# Altium PCB Main.PcbDoc
Units mil, origin at the board's own origin, x right, y up, seen from the top; angles counter-clockwise.
Board outline 2590 x 375 mil, 2 copper layers (Top Layer, Bottom Layer), stack 61.855 mil thick; 38 components, 28 nets, 108 pads, 57 vias.
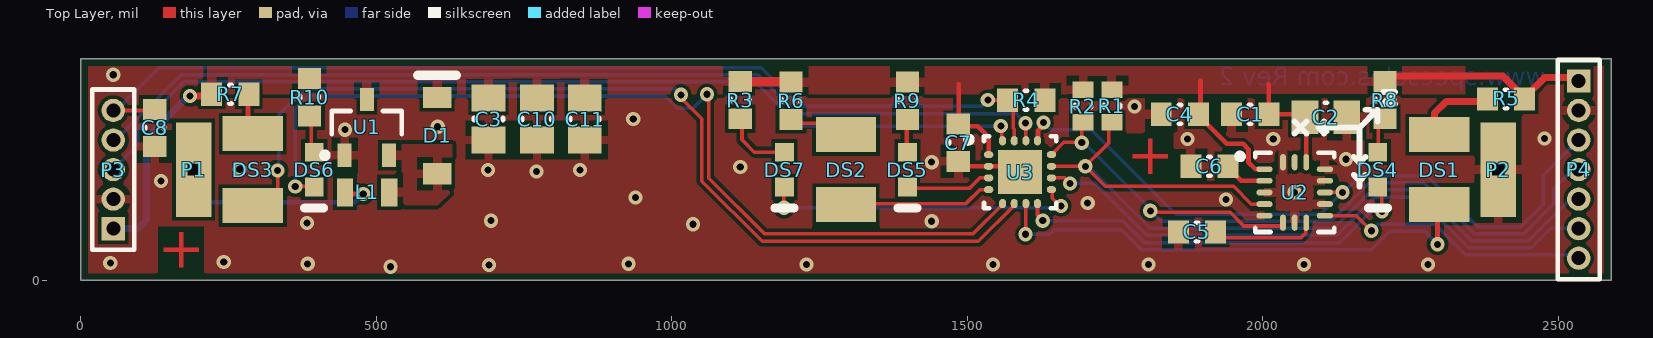
[diagram p0: Top Layer view]
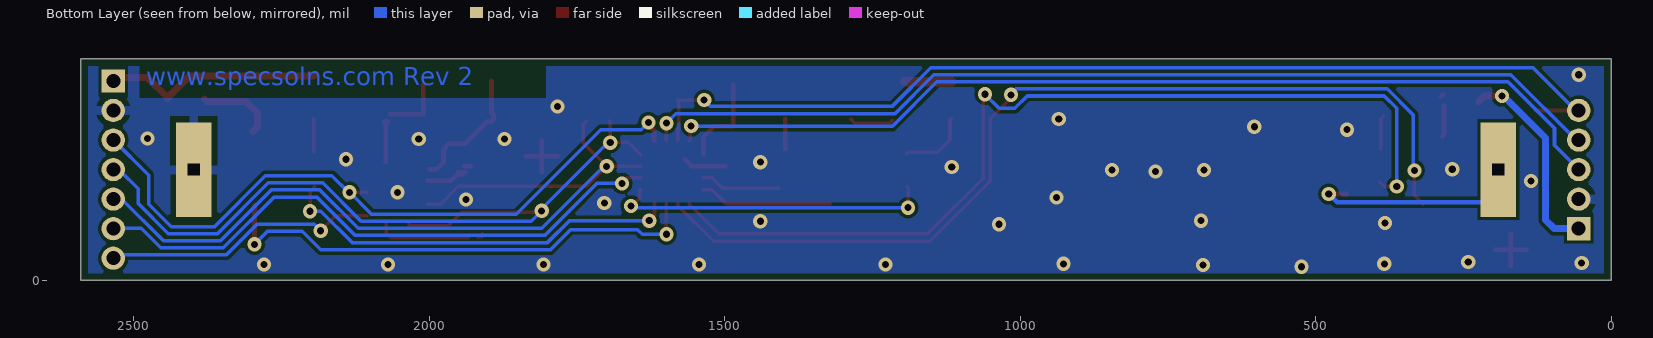
[diagram p1: Bottom Layer view, seen from below]

## Layer stack, top to bottom
Top Solder: solder mask 0.4, Solder Resist, Dk 3.5
Top Layer: signal copper 1.4
Dielectric 1: dielectric 59.0551, FR-4, Dk 4.8
Bottom Layer: signal copper 1.4
Bottom Solder: solder mask 0.4, Solder Resist, Dk 3.5

## Board outline
0,0 2590,0 2590,375 0,375

## Design rules (kind name [scope] priority, off if disabled: settings)
BoardOutlineClearance [All] p1: gap=12 ignorepadtopadclearanceinfootprint=FALSE
Clearance Clearance_1 [All] p1: gap=6 ignorepadtopadclearanceinfootprint=FALSE
ComponentClearance [All] p1: gap=6 collisioncheckmode=3 verticalgap=6 showdistances=TRUE
DiffPairsRouting [All] p1: maxlimit=10 minlimit=6 mostfreqgap=6 toplayer_minwidth=6 toplayer_maxwidth=15 toplayer_prefwidth=8 bottomlayer_minwidth=6 bottomlayer_maxwidth=15 bottomlayer_prefwidth=8 maxuncoupledlength=500
HoleSize [All] p1: absolutevalues=TRUE maxlimit=150 minlimit=7.87 maxpercent=80.000 minpercent=20.000
HoleToHoleClearance [All] p1: gap=18 allowstackedmicrovias=TRUE
MaxMinImpedance [InNet('NetC8_1')] p1: minimum=49.00 maximum=52.00
MinimumAnnularRing [All] p1: minimumring=6
MinimumSolderMaskSliver [All] p1 off: minsoldermaskwidth=6
PlaneClearance [All] p1: clearance=12
PlaneConnect PlaneConnect_IsVia [IsVia] p1: planeconnectstyle=Direct reliefexpansion=20 reliefentries=4 reliefconductorwidth=10 reliefairgap=10
PlaneConnect [All] p2: planeconnectstyle=Relief reliefexpansion=20 reliefentries=4 reliefconductorwidth=15 reliefairgap=12
PolygonConnect PolygonConnect_IsVia [IsVia] p1: connectstyle=Direct reliefconductorwidth=10 reliefentries=4 polygonreliefangle="45 Angle" airgapwidth=10
PolygonConnect [All] p2: connectstyle=Relief reliefconductorwidth=15 reliefentries=4 polygonreliefangle="90 Angle" airgapwidth=10
RoutingVias [All] p1: holewidth=7.87 width=14.17 viastyle="Through Hole" minholewidth=7.87 minwidth=13.78 maxholewidth=28 maxwidth=50
SilkToSilkClearance [All] p1: silktosilkclearance=6
SilkToSolderMaskClearance [IsPad] p1 off: minsilkscreentomaskgap=6 clearancetoexposedcopper=TRUE
SolderMaskExpansion [Not IsVia] p1: expansion=4
Width [All] p1: maxlimit=50 minlimit=4 preferedwidth=6
21 further rules are at their usual default settings.

## Classes and differential pairs
component class Main: C1 C2 C3 C4 C5 C6 C7 C10 C11 D1 DS1 DS2 DS3 DS4 DS5 DS6 DS7 L1 P1 P2 P3 P4 R1 R2 R3 R4 R5 R6 R7 R8 R9 R10

## Components (designator, comment, footprint, x,y, rotation, side; value= is the part's Value field where it differs from the comment)
C1 "CAP 100nF 16V 0603(1608)" CAPC0603(1608)100_N 1979,281 r0 top value=100nF
C2 "CAP 10uF 10V 0805(2012)" CAPC0805(2012)145_N 2107,276 r0 top value=10uF
C3 "CAP 10uF 10V 0805(2012)" CAPC0805(2012)145_N 690,273 r270 top value=10uF
C4 "CAP 100nF 16V 0603(1608)" CAPC0603(1608)100_N 1860,281 r0 top value=100nF
C5 "CAP 100nF 16V 0603(1608)" CAPC0603(1608)100_N 1889,82 r0 top value=100nF
C6 "CAP 100nF 16V 0603(1608)" CAPC0603(1608)100_N 1910,193 r0 top value=100nF
C7 "CAP 100nF 16V 0603(1608)" CAPC0603(1608)100_N 1485,233 r90 top value=100nF
C8 "CAP 100nF 16V 0603(1608)" CAPC0603(1608)100_N 125,258 r90 top value=100nF
C10 "CAP 10uF 10V 0805(2012)" CAPC0805(2012)145_N 772,273 r270 top value=10uF
C11 "CAP 10uF 10V 0805(2012)" CAPC0805(2012)145_N 853,273 r270 top value=10uF
D1 "DSS16UTR" MCC-SOD-123FL_V 603,245 r90 top
DS1 "LR T67F-U1AA-1-1-Z" "LR T67F-U1AA-1-1-Z" 2299,187.5 r270 top locked
DS2 "LY T67F-U1AA-36-1-Z" "LY T67F-U1AA-36-1-Z" 1295,187.5 r270 top locked
DS3 "IN-P32ATG" IN-P32ATG 291,187.5 r270 top locked
DS4 "SX-0603-PINK" LITE-ON-LTST-C191KRKT-2_V 2195,187.5 r270 top locked
DS5 "SX-0603-PINK" LITE-ON-LTST-C191KRKT-2_V 1399,187.5 r270 top locked
DS6 "SX-0603-PINK" LITE-ON-LTST-C191KRKT-2_V 395,187.5 r270 top locked
DS7 "SX-0603-PINK" LITE-ON-LTST-C191KRKT-2_V 1191,187.5 r270 top
L1 "LBR2012T470K" "0805 Inductor" 447,149 r0 top
P1 "No. 5 Terminal" "AA BATTERY TERMINAL"#1 355,495 r90 top
P2 "No. 5 Terminal" "AA BATTERY TERMINAL"#2 2399,187.5 r90 top locked
P3 "MHDR1X5" MHDR1X5 55,87.5 r90 top
P4 "MHDR1X7" MHDR1X7 2535,337.5 r270 top locked
R1 "4K75 1% 0603(1608)" RESC0603(1608)_L 1745,295 r90 top value="4750.00 Ohm"
R2 "4K75 1% 0603(1608)" RESC0603(1608)_L 1696,295 r90 top value="4750.00 Ohm"
R3 "39R 5% 0603(1608)" RESC0603(1608)_N 1116,305 r270 top value="39.00 Ohm"
R4 "10K 5% 0603(1608)" RESC0603(1608)_N 1600,305 r0 top value="10000.00 Ohm"
R5 "56R 5% 0603(1608)" RESC0603(1608)_N 2412,307 r180 top value="56.00 Ohm"
R6 "39R 5% 0603(1608)" RESC0603(1608)_N 1202,304 r270 top value="39.00 Ohm"
R7 "56R 5% 0603(1608)" RESC0603(1608)_N 253,315 r0 top value="56.00 Ohm"
R8 "39R 5% 0603(1608)" RESC0603(1608)_N 2207,305 r270 top value="39.00 Ohm"
R9 "39R 5% 0603(1608)" RESC0603(1608)_N 1399,304 r270 top value="39.00 Ohm"
R10 "39R 5% 0603(1608)" RESC0603(1608)_N 387,310 r270 top value="39.00 Ohm"
U1 "QX2303" SOT95P237X111-3N 484,259 r90 top
U2 "FXOS8700CQR1" QFN50P300X300X120-16N 2054.25,148.78 r0 top
U3 "MKL03Z32VFG4" PQFN50P300X300X6_HS-17N 1589.53,183.15 r0 top
? "Fiducial (Cross)" "Fiducial - Cross" 170,52 r0 top
? "Fiducial (Cross)" "Fiducial - Cross" 1810,210 r0 top

## Footprints (in the part's own frame and the unit in brackets; to place one, negate y for a bottom-side part, rotate by r counter-clockwise, add the part's x,y. Pads: shape width x height; smd on the part's side, far side on the other; paste and mask are expansions set on the pad)
"0805 Inductor" [mm] "0805 Inductor"
  rect 0.7x1.2 smd: 1(0,0) 2(1.9,0)
"AA BATTERY TERMINAL"#1 [mil] "No. 5 Battery Terminal"
  rect 160x60 hole 20 square: 1(-307.5,164)
"AA BATTERY TERMINAL"#2 [mil] "No. 5 Battery Terminal"
  rect 160x60 hole 20 square: 1(0,0)
CAPC0603(1608)100_N [mm] "Chip Capacitor, Body 1.6x0.8mm, Height 1.0mm, IPC Medium Density"
  rect 0.9x1 smd: 1(-0.8,0) 2(0.8,0)
  silkscreen extent -0.05,-0.4 0.05,0.4, body extent -0.87,-0.48 0.88,0.47, height 1
CAPC0805(2012)145_N [mm] "Chip Capacitor, Body 2.0x1.2mm, Height 1.45mm, IPC Medium Density"
  rect 1.15x1.45 smd: 1(-0.9,0) 2(0.9,0)
  silkscreen extent -0.05,-0.62 0.05,0.63, body extent -1.1,-0.72 1.1,0.73, height 1.45
"Fiducial - Cross" [mil] "Fiducial (Cross)"
  Top Layer region: 30,-4 30,4 -30,4 -30,-4
  Top Layer region: -4,-30 4,-30 4,30 -4,30
  Top Layer pour cut-out: -39.37,39.37 39.37,39.37 39.37,-39.37 -39.37,-39.37
IN-P32ATG [mm] "PLCC-2 SMD True Green 527nm"
  rect 1.5x2.6 smd: 1(-1.55,0) 2(1.55,0)
  body extent -1.75,-1.4 1.75,1.4, height 1.9
LITE-ON-LTST-C191KRKT-2_V [mm] "Chip, 2-Leads, Body 1.6x0.8mm"
  rect 0.8x0.8 smd: 1(-0.75,0) 2(0.75,0)
  silkscreen extent 1.65,-0.4 1.65,0.4, body extent -0.8,-0.4 0.8,0.4, height 0.55
"LR T67F-U1AA-1-1-Z" [mm] "PLCC-2 SMD Red 625nm"
  rect 1.5x2.6 smd: 1(-1.5,0) 2(1.5,0)
  body extent -1.7,-1.5 1.7,1.5, height 2.1
"LY T67F-U1AA-36-1-Z" [mm] "PLCC-2 SMD Yellow 590nm"
  rect 1.5x2.6 smd: 1(-1.5,0) 2(1.5,0)
  body extent -1.7,-1.5 1.7,1.5, height 2.1
MCC-SOD-123FL_V [mil] "SODFL, 2-Leads, Body 3.1x1.9mm"
  rect 36x48 smd: 1(-64.5,0) 2(64.5,0)
  silkscreen extent 102,-32 102,32, body extent -73,-37 73,37, height 47
MHDR1X5 [mm] "Connector; Header; 5 Position"
  rect 1x1 hole 0.6: 1(0,0)
  round 1 hole 0.6: 2(1.27,0) 3(2.54,0) 4(3.81,0) 5(5.08,0)
  silkscreen extent -0.9,-0.9 5.98,0.9
MHDR1X7 [mm] "Connector; Header; 7 Position"
  rect 1x1 hole 0.6: 1(0,0)
  round 1 hole 0.6: 2(1.27,0) 3(2.54,0) 4(3.81,0) 5(5.08,0) 6(6.35,0) 7(7.62,0)
  silkscreen extent -0.9,-0.9 8.52,0.9
PQFN50P300X300X6_HS-17N [mm] "PQFN, 16-Leads, Body 3.00x3.00mm, Pitch 0.50mm, Thermal Pad 1.90x1.90mm, IPC Medium Density"
  oval 0.4x0.3 smd paste-0.025: 1(-1.35,0.75) 2(-1.35,0.25) 3(-1.35,-0.25) 4(-1.35,-0.75) 9(1.35,-0.75) 10(1.35,-0.25) 11(1.35,0.25) 12(1.35,0.75)
  oval 0.3x0.4 smd paste-0.025: 5(-0.75,-1.35) 6(-0.25,-1.35) 7(0.25,-1.35) 8(0.75,-1.35) 13(0.75,1.35) 14(0.25,1.35) 15(-0.25,1.35) 16(-0.75,1.35)
  rect 1.9x1.9 smd paste-1.016: 17(0,0)
  silkscreen extent -2.32,-1.55 1.55,1.55, body extent -1.55,-1.55 1.55,1.55, height 0.07
QFN50P300X300X120-16N [mm] "QFN, 16-Leads, Body 3.00x3.00mm, Pitch 0.50mm, IPC Medium Density"
  oval 0.7x0.25 smd paste-0.02: 1(-1.3,1) 2(-1.3,0.5) 3(-1.3,0) 4(-1.3,-0.5) 5(-1.3,-1) 9(1.3,-1) 10(1.3,-0.5) 11(1.3,0) 12(1.3,0.5) 13(1.3,1)
  oval 0.25x0.7 smd paste-0.02: 6(-0.5,-1.3) 7(0,-1.3) 8(0.5,-1.3) 14(0.5,1.3) 15(0,1.3) 16(-0.5,1.3)
  silkscreen extent -2.47,-1.7 4.32,4.32, body extent -1.55,-1.55 1.55,1.55, height 1.2
RESC0603(1608)_L [mm] "Chip Resistor, Body 1.6x0.8mm, IPC High Density"
  rect 0.7x0.9 smd: 1(-0.7,0) 2(0.7,0)
  silkscreen extent -0.05,-0.35 0.05,0.35, body extent -0.85,-0.47 0.85,0.47, height 0.6
RESC0603(1608)_N [mm] "Chip Resistor, Body 1.6x0.8mm, IPC Medium Density"
  rect 0.9x1 smd: 1(-0.8,0) 2(0.8,0)
  silkscreen extent -0.05,-0.4 0.05,0.4, body extent -0.85,-0.47 0.85,0.47, height 0.6
SOT95P237X111-3N [mm] "SOT23, 3-Leads, Body 2.92x2.37mm, Pitch 0.95mm, IPC Medium Density"
  rect 1x0.6 smd: 1(-1.2,0.95) 2(-1.2,-0.95) 3(1.2,0)
  silkscreen extent -1.32,-1.5 0.7,1.92, body extent -1.42,-1.52 1.42,1.52, height 1.11

## Part data
C1 C4 C5 C6 C7 C8: library part CMP-1035-02585-1, "CAP 100nF 16V ±20% 0603 (1608 Metric) Thickness 1mm SMD", Case-EIA=0603, Case-Metric=1608, Rated Voltage="16 V", Tolerance=±20%, Max Thickness="1 mm", Technology=SMT
C2 C3 C10 C11: library part CMP-1036-04924-1, "CAP 10uF 10V ±20% 0805 (2012 Metric) Thickness 1.45mm SMD", Case-EIA=0805, Case-Metric=2012, Rated Voltage="10 V", Tolerance=±20%, Max Thickness="1.45 mm", Technology=SMT
D1: library part CMP-2000-07084-1, "SCHOTTKY 60V SOD-123FL", Forward Current If(AV)=1A, Forward Surge Current Ifsm Max=30A, Forward Voltage VF Max=1.1V, Manufacturer="Micro Commercial Components", Package Description="2-Pin Small Outline Diode, Flat Lead, Body 2.825 x 1.65 mm", Package Reference=SOD-123FL, Repetitive Reverse Voltage Vrrm Max=1kV, Datasheet URL=http://www.mccsemi.com/up_pdf/SM4001PL-SM4007PL(SOD-123FL).PDF, Datasheet Version="Rev. H, 05/2015", Diode Configuration=Single, Diode Type=StandardRecovery, Manufacturer URL=http://www.mccsemi.com/, Mounting Technology=SurfaceMount
DS1: "PLCC-2 SMD RED 625nm"
DS2: "PLCC-2 SMD YELOW 590nm"
DS3: "PLCC-2 SMD True Green 527nm"
DS4 DS5 DS6 DS7: library part CMP-2000-05198-1, "Chip LED, Green, 574 nm, 40 pF, -55 to 85 degC, 2-Pin SMD, RoHS, Tape and Reel", Emitting Color=YellowGreen, Forward Current=30mA, Forward Voltage=2.4V, Manufacturer=Lite-On, Operating Temperature Classification=Industrial, Operating Temp Range=-55Cto85C, Package Type=ChipLed, Power Dissipation=75W, Reverse Voltage=5V, Test Current (It)=20mA, Chip Material=AlGaInP, Datasheet URL=http://download.siliconexpert.com/pdfs/2007/08/26/semi_b/manual/lot/ds/ltst-c191kgkt.pdf, Datasheet Version=Jan-07, DELETED=Compliant, Dominant Wave Length=571nm, High Brightness=Yes, Lens Dimensions=1.1X0.8X0.37mm, Luminous Intensity=35mcd, Lum Intensity=35mcd, Main Category=ChipLED, Manufacturer URL=http://www.us.liteon.com/, Mounting=SurfaceMount, Number of Elements=1, Packaging=TapeandReel, Peak Wavelength=574nm, Pin Count=2, Product Depth (mm)=0.8mm, Product Height (mm)=0.55mm, Product Length (mm)=1.6mm, Rad Hardened=No, Shape Type=Rectangular, Type=Uni-Color, Viewing Angle=130deg
L1: library part LQM21PN1R0NGRD, "FIXED IND 47UH 75MA 1.7 OHM SMD"
P1 P2: library part "AA Battery Terminal", "AA Battery Terminal No. 5"
P3: "Header, 5-Pin", LatestRevisionDate=17-Jul-2002, LatestRevisionNote="Re-released for DXP Platform.", Publisher="Altium Limited"
P4: "Header, 7-Pin", LatestRevisionDate=17-Jul-2002, LatestRevisionNote="Re-released for DXP Platform.", Publisher="Altium Limited"
R1 R2: library part CMP-1012-00587-1, "4K75 0.1W 1% 0603 (1608 Metric)  SMD", Case-EIA=0603, Case-Metric=1608, Power="0.1 W", Tolerance="1 %", Technology=SMT
R3 R6 R8 R9 R10: library part CMP-1012-00040-1, "39R 0.1W 5% 0603 (1608 Metric)  SMD", Case-EIA=0603, Case-Metric=1608, Power="0.1 W", Tolerance="5 %", Technology=SMT
R4: library part CMP-1012-00098-1, "10K 0.1W 5% 0603 (1608 Metric)  SMD", Case-EIA=0603, Case-Metric=1608, Power="0.1 W", Tolerance="5 %", Technology=SMT
R5 R7: library part CMP-1012-00044-1, "56R 0.1W 5% 0603 (1608 Metric)  SMD", Case-EIA=0603, Case-Metric=1608, Power="0.1 W", Tolerance="5 %", Technology=SMT
U1: "3.3V BOOST"
U2: "6-axis sensor with integrated linear accelerometer and magnetometer"
U3: "Kinetis KL03 32 KB Flash QFN 16"
? ?: library part "Fiducial - Cross"

## Via types
v1: diameter 24, hole 12, Top Layer to Bottom Layer, tented both sides, 57 vias

## Nets (pads, with @x,y where several pads share a name; then routed paths per layer and width w, separated by ;. In a path a pad name is that pad's centre, name@x,y a point inside that pad or via, vN(x,y) a via of type N, cw(c..) or ccw(c..) an arc to the next point about the centre after c; other vN are vias at no path point)
3v3: C1.2 C2.1 C3.1 C4.2 C7.2 C10.1 C11.1 D1.2 P3.1 P4.1 R1.2 R2.2 R3.1 R4.2 R5.1 R6.1 R7.1 R8.1 R9.1 R10.1 U1.3 U2.1 U2.14 U3.1 | length 1355.1
  Top Layer w6: R6.1@1195.5,336.5 R6.1@1196,336
  Top Layer w8: 1486,331.5 1486,261 1518,261 1536.38,242.62 U3.1 ; C4.2 1895,284.5 1895,338 ; C4.2@1891.69,272 C4.2@1891.69,281 ; C4.2@1895,270 1894,269 1901,269 1939,231 1967,231 1976,222 1976,200 1988,188 U2.1@2000,188 ; 2010.5,331.5 C1.2 C2.1@2067,281 ; U2.14 C2.1@2073.94,267.06
  Top Layer w12: v1(185,312) 215,312 R7.1@224,303 ; C2.1@2073,268 C2.1@2073.94,267.06 ; R8.1@2196,346 2406.46,346 2442.73,309.73 2443.5,308.97 R5.1 ; R5.1@2442,309 2444,311 2445,311 2477,343 2529.5,343 P4.1 ; P4.1@2534,345 P4.1@2539,340
  Top Layer w16: R3.1 R6.1@1195.5,336.5
  Bottom Layer w12: P3.1 96.5,87.5 111,102 111,241 v1@178,308
\GREEN: DS3.2 U3.6 | length 1622.5
  Top Layer w6: DS3.2@318,129 333,144 v1(333,186) ; v1(1016,314) 1016,308.3 1051,273.3 1051,168 1153,66 1519.05,66 1579.69,126.64 U3.6
  Bottom Layer w6: v1(333,186) 335,188 335,279.97 379.03,324 1008,324 1016,316 v1(1016,314)
\PINK_G: DS6.2 U3.5 | length 1589.1
  Top Layer w6: v1(363,159) 385,159 DS6.2@392,166 ; v1(1060,315) 1063,312 1063,173 1157,79 1509.95,79 1560,129.05 U3.5
  Bottom Layer w6: v1(363,159) 363,291 384,312 988.3,312 1009.3,291 1036,291 v1(1060,315)
\PINK_R: DS4.2 U3.8 | length 689.7
  Top Layer w6: U3.8 1619.06,109.94 v1(1628,101) ; DS4.2@2195,159 2194,158 2202,150 v1(2202,117)
  Bottom Layer w6: v1(1628,101) 1763.04,101 1800.04,64 2130.61,64 2183.61,117 v1(2202,117)
\PINK_Y: DS5.2 U3.3 | length 134.5
  Top Layer w6: DS5.2@1409,156 1504.03,156 1521.33,173.31 U3.3
\RED: DS1.2 U3.7 | length 861.9
  Top Layer w6: v1(1599,78) 1599,129.63 U3.7 ; DS1.2@2295,129 DS1.2@2296,128
  Top Layer w8: v1(2296,61) DS1.2@2296,128
  Bottom Layer w6: v1(1599,78) 1640,78 1648,86 1761.07,86 1795.07,52 2184,52 2215,83 2274,83 v1(2296,61) v1@2301,61
\RST: C8.2 P3.5 R4.1 U3.15 | length 1732.2
  Top Layer w6: P3.5 127.5,287.5 C8.2@129,289 ; v1(1535,305) R4.1 1578.32,305 1579.32,306 1580.32,305 1578,302.69 1578,257.3 1579.69,255.62 U3.15
  Bottom Layer w6: P3.5 59.79,287.5 132.29,360 1151.32,360 1216.32,295 1525,295 v1(1535,305)
\YELLOW: DS2.2 U3.4 | length 224.2
  Top Layer w6: DS2.2@1321.97,130 1498.03,130 1521.65,153.62 U3.4
GND: C1.1 C2.2 C3.2 C4.1 C5.1 C6.1 C7.1 C8.1 C10.2 C11.2 P2.1 P3.2 P4.2 U1.1 U2.3 U2.5 U2.7 U2.10 U2.12 U2.13 U2.16 U3.2 U3.17 | length 73.8
  Top Layer w8: C7.1@1499.01,192.99 U3.2 1536.57,193.18 1556.25,193.18 U3.17@1567.87,204.8
  other v1: 524,23 691,26 1228,27 1544,27 1807,27 2070,27 2280,27 384,28 927,28 50,29.18 242,31 1036,95 383,97 1440,100 694,101 1704,131 1938,137 939,140 2054,149 136,168 771,184 689,187 845,187 269,188 1116,192 1440,200 2141,205 1873,239 2018,239 2477,240 447,255 604,260 935,273 1783,294 55,348
INT1: P4.3 U2.11 U3.13 | length 1186.9
  Top Layer w6: U2.11 2106.04,149.39 2134.61,149.39 v1(2135,149)
  Top Layer w8: U3.13 1619.78,237.03 1619.78,253.45 1629,262.67 v1(1629,267)
  Bottom Layer w6: v1(1629,267) 1641.32,254.68 1710.32,254.68 1853,112 2098,112 v1(2135,149) 2137,149 2165,177 2277.58,177 2363.58,91 2437,91 2475,129 2475,178 2534.5,237.5 P4.3
NetC5_2: C5.2 U2.8 | length 178.3
  Top Layer w6: C5.2@1910.51,79.18 C5.2@1916.01,73.67 ; C5.2@1911.01,73.67 C5.2@1916.01,73.67 ; C5.2@1917.01,72.67 C5.2@1916.01,73.67 ; C5.2@1917.01,73.67 C5.2@1916.01,73.67 ; C5.2@1932.5,74 1934.5,72 2065,72 2073.2,80.2 2073.2,97.2 U2.8@2074,98
NetC6_2: C6.2 U2.2 | length 88.9
  Top Layer w8: C6.2@1929.69,193 C6.2 ; C6.2@1938.5,183 C6.2@1946.8,183 ; C6.2@1943,180 C6.2@1946.8,180 ; C6.2@1946.8,179 C6.2@1949.9,182.1 ; C6.2@1951.15,183.35 C6.2@1949.9,182.1 ; U2.2 1963.54,168.46 C6.2@1949.9,182.1
NetD1_1: D1.1 L1.2 U1.2
NetDS1_1: DS1.1 R5.2 | length 133.8
  Top Layer w12: DS1.1@2299,252 2291,260 2291,283 2311,303 2376.5,303 R5.2
NetDS2_1: DS2.1 R6.2 | length 74.8
  Top Layer w6: R6.2@1217,270.5 1221.5,266 1280,266 DS2.1@1287,273
NetDS3_1: DS3.1 R7.2 | length 58.9
  Top Layer w8: R7.2@283,296 283,247 DS3.1@286,244 ; R7.2 R7.2@288.5,311
NetDS4_1: DS4.1 R8.2 | length 56.9
  Top Layer w6: DS4.1@2195,218 2196,219 R8.2@2196,274.5
NetDS5_1: DS5.1 R9.2 | length 51.5
  Top Layer w8: DS5.1@1398,222 R9.2@1398,273.48
NetDS6_1: DS6.1 R10.2 | length 58.6
  Top Layer w6: R10.2@385,278.5 390,273.5 DS6.1@390,222
NetDS7_1: DS7.1 R3.2 | length 121.8
  Top Layer w6: R3.2 1117.97,273.5 1119,272.47 1119,238 1140,217 1190,217 DS7.1@1193,214
NetP4_7: P4.7 U2.9 | length 469.6
  Top Layer w6: U2.9 2158.59,109.41 v1(2184,84)
  Bottom Layer w6: v1(2184,84) 2195,95 2291.7,95 2343.7,43 2531.5,43 2531.5,41 P4.7
SCL: P4.5 R1.1 U2.4 U3.11 | length 1452.9
  Top Layer w6: U3.11 v1(1700,193) ; R1.1@1734,269.78 1740,263.78 1740,233 v1(1700,193) ; U2.4 1980.91,129.09 1951,159 1734,159 v1(1700,193)
  Bottom Layer w6: v1(1700,193) 1704.98,193 1809.98,88 2120.67,88 2185.67,153 2267.64,153 2353.64,67 2449.94,67 2520.44,137.5 P4.5
SDA: P4.4 R2.1 U2.6 U3.12 | length 1373.8
  Top Layer w6: U3.12 1663.68,233.68 v1@1694,233.68 ; v1(1694,233) v1@1694,233.68 ; R2.1@1696,269.78 1694,267.78 v1@1694,233.68 ; v1(1810,117.68) 1812.68,115 1945,115 1968,92 2034,92 2033.83,92.17 2033.83,96.86 U2.6
  Bottom Layer w6: v1@1695,236 1810,121 v1(1810,117.68) 1827.68,100 2115.7,100 2180.7,165 2272.61,165 2358.61,79 2441.97,79 2493,130.03 2493,155 2522.31,184.31 2531.81,184.31 P4.4 2535,178.07 P4.4@2529.27,178.07
SWD_CLK: P3.4 U3.14 | length 1653.6
  Top Layer w6: v1(1599,266) 1599,265.74 1599.37,265.37 U3.14
  Bottom Layer w6: P3.4 59.32,237.5 169.82,348 1146.35,348 1212.17,282.17 1582.83,282.17 v1(1599,266)
SWD_DIO: P3.3 U3.16 | length 1637.3
  Top Layer w6: v1(1557,261) 1558.89,259.11 1558.89,237.41 U3.16
  Bottom Layer w6: P3.3 96,228.5 96,257.21 174.79,336 1141.38,336 1216.38,261 v1(1557,261)
UART_TX: P4.6 U3.10 | length 1032.8
  Top Layer w6: U3.10 1643.37,174 1664.13,174 1673.13,165 v1@1679,165
  Bottom Layer w6: v1(1674,164) 1717.01,164 1805.01,76 2125.64,76 2190.64,141 2262.67,141 2348.67,55 2454.91,55 2487.91,88 2521.35,88 2525.68,83.68 2525.68,96.82 P4.6
UV_Center: DS7.2 U3.9 | length 540.2
  Top Layer w6: v1@1190,124 1190,156.97 DS7.2 ; U3.9 1644.28,152.02 1644.28,138.72 1657,126 v1(1659,126)
  Bottom Layer w6: v1(1190,123) 1656,123 v1(1659,126)
VBAT: L1.1 P1.1 | length 378.3
  Top Layer w8: L1.1@448,146 v1(478,146)
  Bottom Layer w8: P1.1 191,132 464,132 v1(478,146)
pads on no net: U2.15

## Polygon pours and split planes (outlines as drawn)
GND on Top Layer "GND_L01_P008" (solid, remove dead copper, pour order 8): 0,1 1,0 2590,0 2590,375 0,375
3v3 on Top Layer "3V3_L01_P004" (solid, pour order 4): 214,375 214,315 2343,315 2343,375
NetD1_1 on Top Layer "NETD1_1_L01_P006" (solid, remove dead copper, pour order 6): 528.75,126.5 528.75,230.51 628.75,230.51 628.75,151.16 603.75,127.25
GND on Bottom Layer "GND_L02_P010" (solid, remove dead copper, pour order 10): 0,0 2590,0 2590,375 0,375

## Other copper
Bottom Layer:
  text "www.specsolns.com Rev 2" at 2478.83,330 h30

## Silkscreen, mask and mechanical layers (free items; w line width, h text height)
Mechanical 3 (Mech3):
  the board outline again, w8